# Altium PCB cardio_pcb_gnd40.PcbDoc
Units mil, origin at the board's own origin, x right, y up, seen from the top; angles counter-clockwise.
Board outline 6890 x 3346 mil, 2 copper layers (Top Layer, Bottom Layer); 111 components, 104 nets, 414 pads, 60 vias.
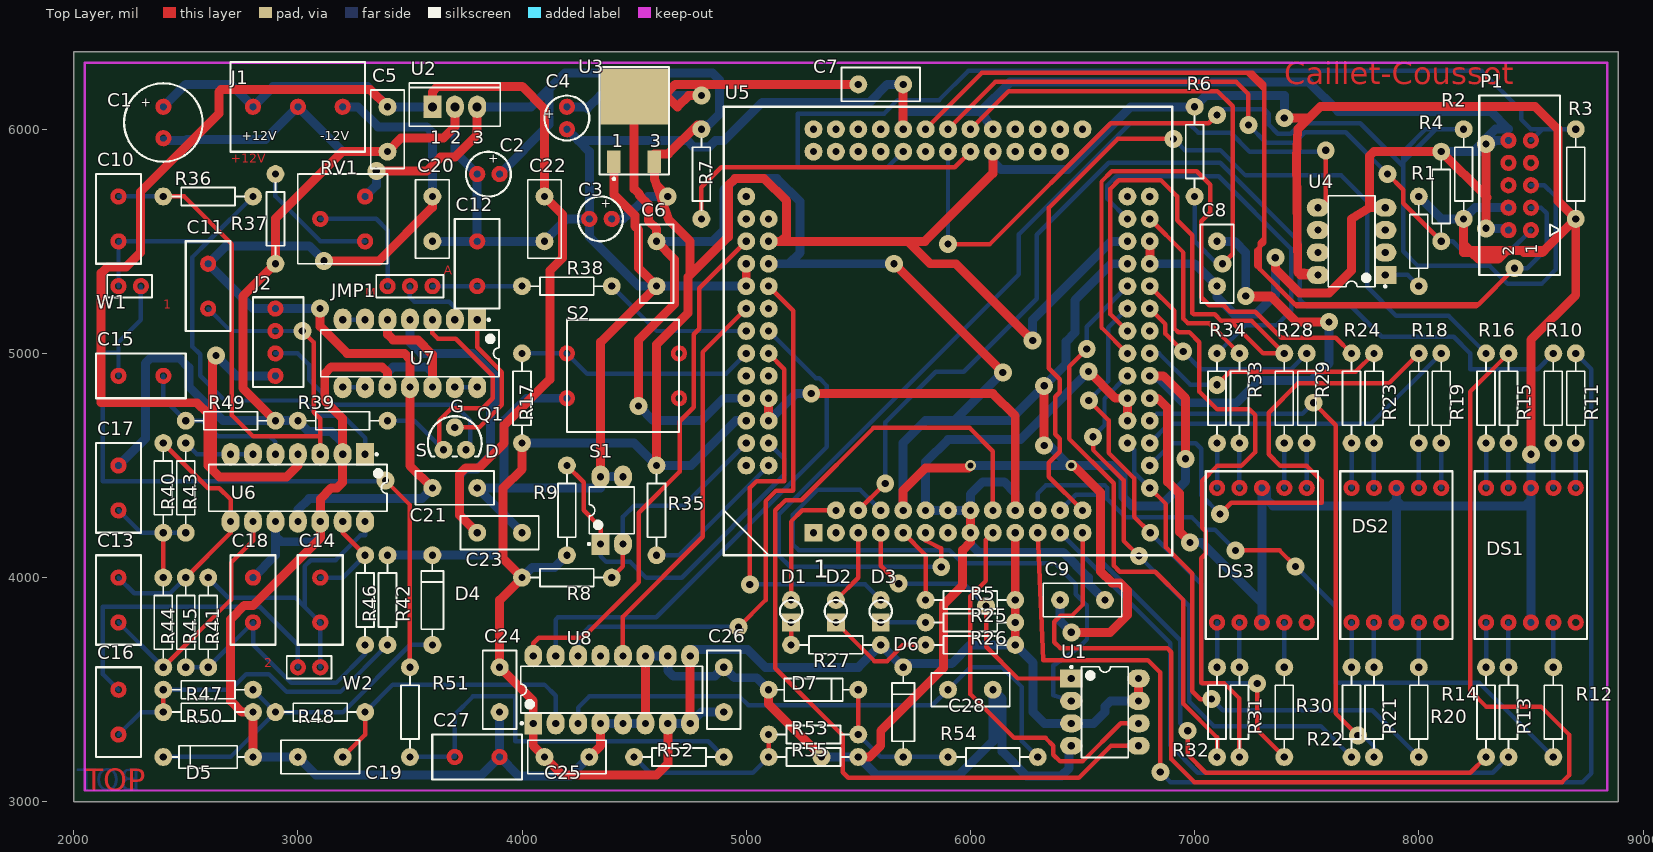
[diagram p0: Top Layer view]
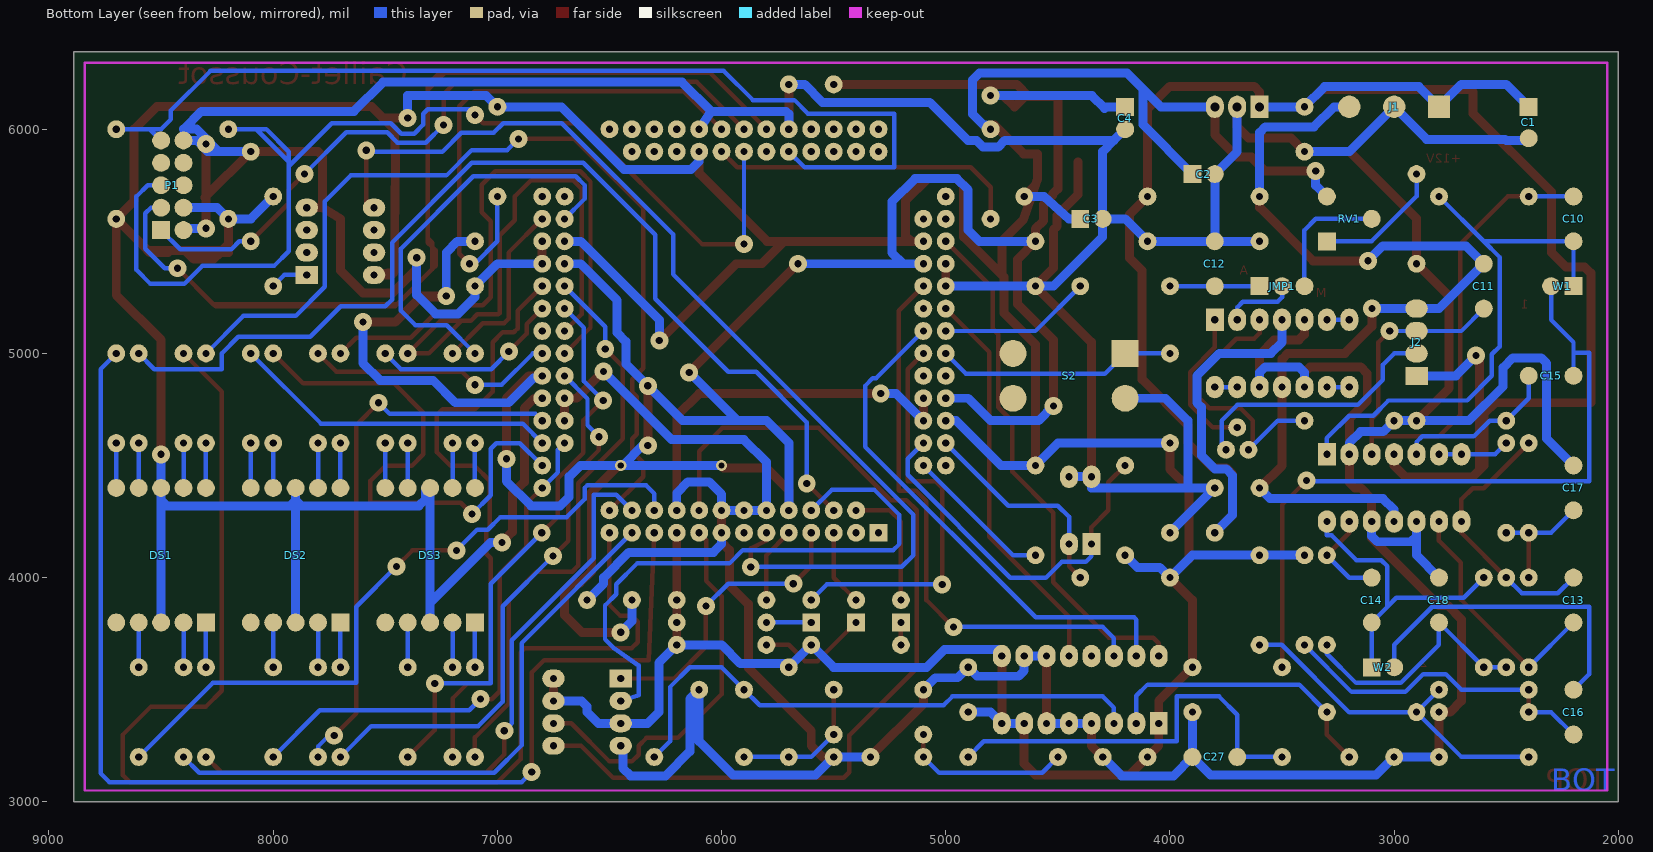
[diagram p1: Bottom Layer view, seen from below]

## Layer stack, top to bottom
Top Solder: solder mask 0.4, Solder Resist, Dk 3.5
Top Layer: signal copper 1.4
Dielectric 1: dielectric 12.6, FR-4, Dk 4.8
Bottom Layer: signal copper 1.4
Bottom Solder: solder mask 0.4, Solder Resist, Dk 3.5

## Board outline
2000,3000 8890,3000 8890,6346 2000,6346

## Design rules (kind name [scope] priority, off if disabled: settings)
Clearance [All] p1: gap=20
PolygonConnect [All] p1: connectstyle=Relief reliefconductorwidth=10 reliefentries=4 polygonreliefangle="90 Angle" airgapwidth=10
RoutingVias [All] p1: holewidth=32 width=80 viastyle="Through Hole" minholewidth=28 minwidth=50 maxholewidth=28 maxwidth=50
SolderMaskExpansion [All] p1: expansion=4
Width GND [InNet('GND')] p1: maxlimit=40 minlimit=20 preferedwidth=40
Width 3V3 [InNet('3V3')] p2: maxlimit=40 minlimit=20 preferedwidth=40
Width 1V5 [InNet('1V5')] p3: maxlimit=40 minlimit=20 preferedwidth=40
Width +12V [InNet('+12V')] p4: maxlimit=40 minlimit=20 preferedwidth=40
Width -12V [InNet('-12V')] p5: maxlimit=40 minlimit=20 preferedwidth=40
Width [All] p6: maxlimit=20 minlimit=20 preferedwidth=20
30 further rules are at their usual default settings.

## Classes and differential pairs
component class CONTROL: C1 C2 C3 C4 C5 C6 C7 C8 C9 D1 D2 D3 DS1 DS2 DS3 J1 P1 R1 R2 R3 R4 R5 R6 R7 R8 R9 R10 R11 R12 R13 R14 R15 R16 R17 R18 R19 R20 R21 R22 R23 R24 R25 R26 R27 R28 R29 R30 R31 R32 R33 R34 R35 S1 S2 U1 U2 U3 U4 U5
component class INTER: C10 C11 C12 C13 C14 C15 C16 C17 C18 C19 C20 C21 C22 C23 C24 C25 C26 C27 C28 D4 D5 D6 D7 J2 JMP1 Q1 R36 R37 R38 R39 R40 R41 R42 R43 R44 R45 R46 R47 R48 R49 R50 R51 R52 R53 R54 R55 RV1 U6 U7 U8 W1 W2
net class AFFC[0..6]: AFFC0 AFFC1 AFFC2 AFFC3 AFFC4 AFFC5 AFFC6
net class AFFD[0..6]: AFFD0 AFFD1 AFFD2 AFFD3 AFFD4 AFFD5 AFFD6
net class AFFU[0..6]: AFFU0 AFFU1 AFFU2 AFFU3 AFFU4 AFFU5 AFFU6

## Components (designator, comment, footprint, x,y, rotation, side; value= is the part's Value field where it differs from the comment)
C1 "100uF" RB0.14/0.35 2400,6100 r270 top
C2 "2.2uF" RB0.1/0.2 3900,5800 r180 top
C3 "10uF" RB0.1/0.2 4400,5600 r180 top
C4 "10uF" RB0.1/0.2 4200,6100 r270 top
C5 "0.1uF" RAD-0.2 3400,6000 r90 top
C6 "100nF" RAD-0.2 4600,5400 r90 top
C7 "100nF" RAD-0.2 5600,6200 r180 top
C8 "100nF" RAD-0.2 7100,5400 r90 top
C9 "100nF" RAD-0.2 6500,3900 r180 top
C10 "4.7nF" RAD-0.2-BOT 2200,5500 r90 top
C11 "470pF" RAD-0.2-BOT 2600,5200 r90 top
C12 "470nF" RAD-0.2-BOT 3800,5500 r270 top
C13 "15nF" RAD-0.2-BOT 2200,4000 r270 top
C14 "4.7nF" RAD-0.2-BOT 3100,3800 r90 top
C15 "470nF" RAD-0.2-BOT 2400,4900 r180 top
C16 "470nF" RAD-0.2-BOT 2200,3500 r270 top
C17 "220nF" RAD-0.2-BOT 2200,4300 r90 top
C18 "470nF" RAD-0.2-BOT 2800,3800 r90 top
C19 "100nF" RAD-0.2 3100,3200 r0 top
C20 "100nF" RAD-0.2 3600,5600 r90 top
C21 "100nF" RAD-0.2 3700,4400 r180 top
C22 "100nF" RAD-0.2 4100,5600 r90 top
C23 "100nF" RAD-0.2 3900,4200 r180 top
C24 "100nF" RAD-0.2 3900,3500 r90 top
C25 "100nF" RAD-0.2 4200,3200 r180 top
C26 "100nF" RAD-0.2 4900,3500 r270 top
C27 "470nF" RAD-0.2-BOT 3700,3200 r0 top
C28 "100nF" RAD-0.2 6000,3500 r180 top
D1 "LED0" LED-3MM 5200,3800 r90 top
D2 "LED0" LED-3MM 5400,3800 r90 top
D3 "LED0" LED-3MM 5600,3800 r90 top
D4 "1N4148" DIODE-0.4 3600,3900 r90 top
D5 "1N4148" DIODE-0.4 2600,3200 r180 top
D6 "1N4148" DIODE-0.4 5700,3400 r90 top
D7 "1N4148" DIODE-0.4 5300,3500 r0 top
DS1 "Dpy Blue-CA" AFF7SEG-14MM 8300,3800 r0 top
DS2 "Dpy Blue-CA" AFF7SEG-14MM 7700,3800 r0 top
DS3 "Dpy Blue-CA" AFF7SEG-14MM 7100,3800 r0 top
J1 "BORNIER 3 VIS" BORNIER-3 2800,6100 r0 top
J2 "CAPTEUR-CARDIO" KK-1X4M 2900,4900 r90 top
JMP1 "JUMPER-INV" JMP3-INV-0.1 3600,5300 r180 top
P1 "MHDR2X5" HE10-2X5M 8500,5550 r90 top
Q1 "2N7000" NMOS-TO92 3700,4600 r0 top
R1 "1K" AXIAL-0.4 8000,5500 r270 top
R2 "1K" AXIAL-0.4 8200,5800 r90 top
R3 "1K" AXIAL-0.4 8700,5800 r90 top
R4 "1K" AXIAL-0.4 8100,5700 r90 top
R5 "10K" AXIAL-0.4 6000,3900 r180 top
R6 "10K" AXIAL-0.4 7000,5900 r270 top
R7 "10K" AXIAL-0.4 4800,5800 r270 top
R8 "1K" AXIAL-0.4 4200,4000 r180 top
R9 "1K" AXIAL-0.4 4200,4300 r270 top
R10 "120" AXIAL-0.4 8600,4800 r270 top
R11 "120" AXIAL-0.4 8700,4800 r270 top
R12 "120" AXIAL-0.4 8600,3400 r90 top
R13 "120" AXIAL-0.4 8400,3400 r90 top
R14 "120" AXIAL-0.4 8300,3400 r90 top
R15 "120" AXIAL-0.4 8400,4800 r270 top
R16 "120" AXIAL-0.4 8300,4800 r270 top
R17 "1K" AXIAL-0.4 4000,4800 r270 top
R18 "120" AXIAL-0.4 8000,4800 r270 top
R19 "120" AXIAL-0.4 8100,4800 r270 top
R20 "120" AXIAL-0.4 8000,3400 r90 top
R21 "120" AXIAL-0.4 7800,3400 r90 top
R22 "120" AXIAL-0.4 7700,3400 r90 top
R23 "120" AXIAL-0.4 7800,4800 r270 top
R24 "120" AXIAL-0.4 7700,4800 r270 top
R25 "820" AXIAL-0.4 6000,3800 r0 top
R26 "820" AXIAL-0.4 6000,3700 r0 top
R27 "820" AXIAL-0.4 5400,3700 r0 top
R28 "120" AXIAL-0.4 7400,4800 r270 top
R29 "120" AXIAL-0.4 7500,4800 r270 top
R30 "120" AXIAL-0.4 7400,3400 r90 top
R31 "120" AXIAL-0.4 7200,3400 r90 top
R32 "120" AXIAL-0.4 7100,3400 r90 top
R33 "120" AXIAL-0.4 7200,4800 r270 top
R34 "120" AXIAL-0.4 7100,4800 r270 top
R35 "10K" AXIAL-0.4 4600,4300 r90 top
R36 "1M" AXIAL-0.4 2600,5700 r0 top
R37 "100" AXIAL-0.4 2900,5600 r90 top
R38 "3.3K" AXIAL-0.4 4200,5300 r180 top
R39 "82" AXIAL-0.4 3200,4700 r180 top
R40 "390K" AXIAL-0.4 2400,4400 r90 top
R41 "390K" AXIAL-0.4 2600,3800 r90 top
R42 "4.7M" AXIAL-0.4 3400,3900 r90 top
R43 "56K" AXIAL-0.4 2500,4400 r90 top
R44 "200K" AXIAL-0.4 2400,3800 r270 top
R45 "56K" AXIAL-0.4 2500,3800 r90 top
R46 "300K" AXIAL-0.4 3300,3900 r90 top
R47 "2.2M" AXIAL-0.4 2600,3500 r180 top
R48 "1K" AXIAL-0.4 3100,3400 r180 top
R49 "4.7M" AXIAL-0.4 2700,4700 r180 top
R50 "4.7M" AXIAL-0.4 2600,3400 r180 top
R51 "6.8M" AXIAL-0.4 3500,3400 r90 top
R52 "200" AXIAL-0.4 4700,3200 r180 top
R53 "2.2K" AXIAL-0.4 5300,3300 r180 top
R54 "1K" AXIAL-0.4 6100,3200 r180 top
R55 "100" AXIAL-0.4 5300,3200 r0 top
RV1 "1K" VR-3386F-T 3200,5600 r90 top
S1 "SW2 DIP4" DIP-4 4400,4300 r90 top
S2 "SW-PB" BP-MJTP12 4200,5000 r270 top
U1 "EPCS1SI8N" DIP-8 6600,3400 r0 top
U2 "LF33CV" REG-TO220 3600,6100 r90 top
U3 "NCP1117DT" REG-DPAK 4500,6000 r0 top
U4 "SG-8002DCPCB 20 MHZ" DIP-8 7700,5500 r180 top
U5 "EP1C3T100" SUPPORT-TQFP100 5300,4200 r90 top
U6 "TL074CN" DIP-14 3000,4400 r270 top
U7 "TL074CN" DIP-14 3500,5000 r270 top
U8 "ADS7841PB" DIP-16 4400,3500 r90 top
W1 "Jumper" JMP2-0.1 2200,5300 r0 top
W2 "Jumper" JMP2-0.1 3100,3600 r180 top

## Footprints (in the part's own frame and the unit in brackets; to place one, negate y for a bottom-side part, rotate by r counter-clockwise, add the part's x,y. Pads: shape width x height; smd on the part's side, far side on the other; paste and mask are expansions set on the pad)
AFF7SEG-14MM [mil] "Aff 7 seg (14mm) footprint"
  rect 80x80 smd far side: 1(0,0)
  round 80 smd far side: 2(100,0) 3(200,0) 4(300,0) 5(400,0) 6(400,600) 7(300,600) 8(200,600) 9(100,600) 10(0,600)
  Top Layer circle w20: c0,600 r26
  Top Layer circle w20: c100,600 r26
  Top Layer circle w20: c200,600 r26
  Top Layer circle w20: c300,600 r26
  Top Layer circle w20: c400,600 r26
  Top Layer circle w20: c400,0 r26
  Top Layer circle w20: c300,0 r26
  Top Layer circle w20: c200,0 r26
  Top Layer circle w20: c100,0 r26
  Top Layer circle w20: c0,0 r26
  silkscreen extent -50,-74 450,674
AXIAL-0.4 [mil] "Axial Device, Thru-Hole; 2 Leads; 0.4 in Pin Spacing"
  round 80 hole 32: 1(-200,0) 2(200,0)
  silkscreen extent -160,-40 160,40
BORNIER-3 [mil] "BORNIER-3 footprint"
  rect 100x100 smd far side: 1(0,0)
  round 100 smd far side: 2(200,0) 3(400,0)
  Top Layer circle w20: c0,0 r26
  Top Layer circle w20: c200,0 r26
  Top Layer circle w20: c400,0 r26
  silkscreen extent -100,-200 500,200
BP-MJTP12 [mil] "BP footprint"
  rect 120x120 smd far side: 1(0,0)
  round 120 smd far side: 2(200,0) 3(200,500) 4(0,500)
  Top Layer circle w20: c0,500 r26
  Top Layer circle w20: c200,500 r26
  Top Layer circle w20: c200,0 r26
  Top Layer circle w20: c0,0 r26
  silkscreen extent -150,0 350,500
DIODE-0.4 [mil] "Diode, Thru-Hole; 2 Leads; 0.4 in Pin Spacing"
  round 80 hole 32: 1(-200,0) 2(200,0)
  silkscreen extent -160,-50 160,50
DIP-4 [mil] "DIP; 4 Leads; Row Spacing 7.62 mm; Pitch 2.54 mm"
  rect 100x80 hole 32: 1(-150,50)
  oval 100x80 hole 32: 2(-150,-50) 3(150,-50) 4(150,50)
  silkscreen extent -155,-100 104,106, body extent -124,-98 124,98, height 220
DIP-8 [mil] "DIP; 8 Leads; Row Spacing 7.62 mm; Pitch 2.54 mm"
  rect 100x80 hole 32: 1(-150,150)
  oval 100x80 hole 32: 2(-150,50) 3(-150,-50) 4(-150,-150) 5(150,-150) 6(150,-50) 7(150,50) 8(150,150)
  silkscreen extent -155,-203 104,206, body extent -142,-203 142,203, height 200
DIP-14 [mil] "DIP; 14 Leads; Row Spacing 7.62 mm; Pitch 2.54 mm"
  rect 100x80 hole 32: 1(-150,300)
  oval 100x80 hole 32: 2(-150,200) 3(-150,100) 4(-150,0) 5(-150,-100) 6(-150,-200) 7(-150,-300) 8(150,-300) 9(150,-200) 10(150,-100) 11(150,0) 12(150,100) 13(150,200) 14(150,300)
  silkscreen extent -155,-398 104,398, body extent -142,-398 142,398, height 200
DIP-16 [mil] "DIP; 16 Leads; Row Spacing 7.62 mm; Pitch 2.54 mm"
  rect 100x80 hole 32: 1(-150,350)
  oval 100x80 hole 32: 2(-150,250) 3(-150,150) 4(-150,50) 5(-150,-50) 6(-150,-150) 7(-150,-250) 8(-150,-350) 9(150,-350) 10(150,-250) 11(150,-150) 12(150,-50) 13(150,50) 14(150,150) 15(150,250) 16(150,350)
  silkscreen extent -155,-406 104,406, body extent -142,-405 142,405, height 200
HE10-2X5M [mil] "CONNECTOR HE10 2X5 MALE"
  rect 80x80 smd far side: 1(0,0)
  round 80 smd far side: 2(0,100) 3(100,0) 4(100,100) 5(200,0) 6(200,100) 7(300,0) 8(300,100) 9(400,0) 10(400,100)
  Top Layer circle w20: c0,100 r26
  Top Layer circle w20: c100,100 r26
  Top Layer circle w20: c200,100 r26
  Top Layer circle w20: c300,100 r26
  Top Layer circle w20: c400,100 r26
  Top Layer circle w20: c400,0 r26
  Top Layer circle w20: c300,0 r26
  Top Layer circle w20: c200,0 r26
  Top Layer circle w20: c100,0 r26
  Top Layer circle w20: c0,0 r26
  silkscreen extent -200,-130 600,230
JMP2-0.1 [mil] "CAVALIER 3cts HE14 PAS 2.54MM"
  rect 80x80 smd far side: 1(0,0)
  round 80 smd far side: 2(100,0)
  Top Layer circle w20: c0,0 r26
  Top Layer circle w20: c100,0 r26
  silkscreen extent -50,-50 150,50
JMP3-INV-0.1 [mil] "CAVALIER 3cts HE14 PAS 2.54MM"
  rect 80x80 smd far side: 1(0,0)
  round 80 smd far side: 2(100,0) 3(200,0)
  Top Layer circle w20: c0,0 r26
  Top Layer circle w20: c100,0 r26
  Top Layer circle w20: c200,0 r26
  silkscreen extent -50,-50 250,50
KK-1X4M [mil]
  rect 80x100 smd far side: 1(0,0)
  oval 80x100 smd far side: 2(100,0) 3(200,0) 4(300,0)
  Top Layer circle w20: c0,0 r26
  Top Layer circle w20: c100,0 r26
  Top Layer circle w20: c200,0 r26
  Top Layer circle w20: c300,0 r26
  silkscreen extent -50,-125 350,100
LED-3MM [mil] "Led footprint"
  rect 80x80 hole 32: 1(0,0)
  round 80 hole 32: 2(100,0)
  silkscreen extent 0,-50 100,50
NMOS-TO92 [mil] "NMOS TO92"
  round 80 hole 32: 1(50,-30) 2(0,70) 3(-50,-30)
  silkscreen extent -120,-60 120,120
RAD-0.2 [mil] "Radial Cap, Thru-Hole; 2 Leads; 0.2 in Pin Spacing"
  round 80 hole 32: 1(-100,0) 2(100,0)
  silkscreen extent -175,-75 175,75
RAD-0.2-BOT [mil]
  round 80 smd far side: 1(0,0) 2(200,0)
  Top Layer circle w20: c0,0 r26
  Top Layer circle w20: c200,0 r26
  silkscreen extent -100,-100 300,100
RB0.1/0.2 [mil] "Capa < 100uF Footprint"
  rect 80x80 smd far side: 1(0,0)
  round 80 smd far side: 2(100,0)
  Top Layer circle w20: c100,0 r26
  Top Layer circle w20: c0,0 r26
  silkscreen extent -50,-100 150,100
RB0.14/0.35 [mil] "Capa <470 uF footprint"
  rect 80x80 smd far side: 1(0,0)
  round 80 smd far side: 2(140,0)
  Top Layer circle w20: c0,0 r26
  Top Layer circle w20: c140,0 r26
  silkscreen extent -105,-175 245,175
REG-DPAK [mm]
  rect 1.524x2.54 smd: 1(-2.285,-3.7) 3(2.285,-3.7)
  rect 7.62x6.35 smd: 4(0,3.7)
  silkscreen extent -3.94,-5.75 3.94,7.06
REG-TO220 [mil]
  rect 100x80 hole 40: 1(0,0)
  oval 100x80 hole 40: 2(0,-100) 3(0,-200)
  silkscreen extent -87,-303 106,103
SUPPORT-TQFP100 [mil]
  rect 80x80 hole 32: 1(0,0)
  round 80 hole 32: 2(0,-100) 3(100,-100) 4(0,-200) 5(100,-200) 6(0,-300) 7(100,-300) 8(0,-400) 9(100,-400) 10(0,-500) 11(100,-500) 12(0,-600) 13(100,-600) 14(0,-700) 15(100,-700) 16(0,-800) 17(100,-800) 18(0,-900) 19(100,-900) 20(0,-1000) 21(100,-1000) 22(0,-1100) 23(100,-1100) 24(0,-1200) 25(100,-1200) 26(300,-1500) 27(400,-1500) 28(400,-1400) 29(500,-1500) 30(500,-1400) 31(600,-1500) 32(600,-1400) 33(700,-1500) 34(700,-1400) 35(800,-1500) 36(800,-1400) 37(900,-1500) 38(900,-1400) 39(1000,-1500) 40(1000,-1400) 41(1100,-1500) 42(1100,-1400) 43(1200,-1500) 44(1200,-1400) 45(1300,-1500) 46(1300,-1400) 47(1400,-1500) 48(1400,-1400) 49(1500,-1500) 50(1500,-1400) 51(1800,-1200) 52(1800,-1100) 53(1700,-1100) 54(1800,-1000) 55(1700,-1000) 56(1800,-900) 57(1700,-900) 58(1800,-800) 59(1700,-800) 60(1800,-700) 61(1700,-700) 62(1800,-600) 63(1700,-600) 64(1800,-500) 65(1700,-500) 66(1800,-400) 67(1700,-400) 68(1800,-300) 69(1700,-300) 70(1800,-200) 71(1700,-200) 72(1800,-100) 73(1700,-100) 74(1800,0) 75(1700,0) 76(1500,300) 77(1400,300) 78(1400,200) 79(1300,300) 80(1300,200) 81(1200,300) 82(1200,200) 83(1100,300) 84(1100,200) 85(1000,300) 86(1000,200) 87(900,300) 88(900,200) 89(800,300) 90(800,200) 91(700,300) 92(700,200) 93(600,300) 94(600,200) 95(500,300) 96(500,200) 97(400,300) 98(400,200) 99(300,300) 100(300,200)
  silkscreen extent -100,-1600 1900,400
VR-3386F-T [mil] "TRIMMER serie 3386F-T"
  rect 80x80 smd far side: 1(-100,-100)
  round 80 smd far side: 2(100,-100) 3(0,100)
  Top Layer circle w20: c100,-100 r26
  Top Layer circle w20: c-100,-100 r26
  Top Layer circle w20: c0,100 r26
  silkscreen extent -200,-200 200,200

## Part data
C1 C2 C3 C4: library part "Cap Pol2", "Electrolytic Polarized Capacitor (Axial)"
C5 C6 C7 C8 C9: library part Cap, "Ceramic Multilayer Capacitor"
C10 C11 C12 C13 C14 C15 C16 C17 C18 C27: library part Cap, "Capacitor Polyester 5%"
C19 C20 C21 C22 C23 C24 C25 C26 C28: library part Cap, "Capacitor Céramique Multicouche X7R 50V RadialPas=5.08mm 50%"
D1 D2 D3: "Typical INFRARED GaAs LED"
D4 D5 D6 D7: "High Conductance Fast Diode"
DS1 DS2 DS3: "14.2 mm General Purpose Blue 7-Segment Display: CA, RH DP, Gray Surface"
J1: library part BORNIER-3, "Bornier 3 cts"
J2: "CAPTEUR CARDIO"
JMP1: "JUMPER INVERSEUR HE14 MALE 3 cts"
P1: "Header, 5-Pin, Dual row"
Q1: "N-channel Enhancement Mode Field-effect Transistor"
R1 R2 R3 R4 R5 R6 R7 R8 R9 R10 R11 R12 R13 R14 R15 R16 R17 R18 R19 R20 R21 R22 R23 R24 R25 R26 R27 R28 R29 R30 R31 R32 R33 R34 R35: library part Res2, "Resistor"
R36 R40 R41 R42 R43 R44 R45 R46 R47 R49 R50 R51: library part Res2, "Resistor 1% Couche métallique 0.4W Axial L=7mm"
R37 R38 R39 R48 R52 R53 R54 R55: library part Res2, "Resistor 5% Couche métallique 0.4W Axial L=7mm"
RV1: library part R-TRIM, "TRIMMER PRECISION POTENTIOMETER"
S1: library part SW2-DIP4, "Dual Switch in DIP 4 pin"
S2: "Switch"
U1: "EPCS1 Series, In-system programmable 3.3V serial configuration device, 8-Pin SOIC, 1-Megabit, Industrial Grade, Pb-Free"
U2: "500mA, Very Low Drop (0.45V) Voltage Regulator"
U3: "Low drop out Positive Fix. or Adj. Voltage Regulator"
U4: "OSCILLATOR SG-8002DCPCB 20 MHZ 5V"
U5: "FPGA CYCLONE 1 TQPF100"
U6 U7: "Low-Noise JFET-Input Operational Amplifier"
U8: "Analog to Digital converter"
W1 W2: "Jumper Wire"

## Via types
v1: diameter 80, hole 32, Top Layer to Bottom Layer, 58 vias
v2: diameter 50, hole 28, Top Layer to Bottom Layer, 2 vias

## Nets (pads, with @x,y where several pads share a name; then routed paths per layer and width w, separated by ;. In a path a pad name is that pad's centre, name@x,y a point inside that pad or via, vN(x,y) a via of type N, cw(c..) or ccw(c..) an arc to the next point about the centre after c; other vN are vias at no path point)
1V5: C4.1 C6.2 C7.2 C8.2 C9.2 U3.4 U5.9 U5.33 U5.44 U5.82 U5.93 | length 15064.4
  Top Layer w40: v1(4520,4766) 4520,5060 4680,5220 4680,5420 C6.2 4600,5555.69 4563.5,5592.19 4563.5,5663.82 4550.3,5677.02 4550.3,5677.62 4524.47,5703.45 4524.47,5709.53 4500,5734 U3.4 U3.4@4630,6145.67 ; v1(4800,6150) 4743,6150 4693,6100 4647.33,6145.67 U3.4@4630,6145.67 ; v1(5659.79,5400) v1(6144.4,4915.4) ; U5.9 5700,4389 5800,4489 5992,4489 v2@6003,4500 ; v1(6329,4590) v1(6329,4855.61) ; v1(6450,3756) 6623,3756 6700,3833 6700,3943 6667,3976 6632,3976 6580,4028 6580,4380 v2@6455,4505 ; U5.33 6860,4900 6960,4800 v1(6960,4530) ; v1(7600,5140) 7455.58,5140 7344.93,5250.64 ; U3.4@4630,6145.67 4684.33,6200 ; 4684.33,6200 4800,6200 C7.2 4684.33,6200 ; 7344.93,5250.64 7233.36,5250.64 v1(7228,5256) 7339.58,5256 7344.93,5250.64
  Bottom Layer w40: C4.1 4284,6100 4291,6093 4348,6150 v1(4800,6150) ; v1(4520,4766) 4586,4700 4800,4700 4900,4800 U5.93 ; C6.2 4850,5500 4900,5550 4900,5730 4950,5780 5137,5780 5240,5677 5240,5450 5190,5400 ; U5.82 5190,5400 ; v1(5659.79,5400) 5190,5400 ; U5.9 5700,4601 5800,4701 5930,4701 ; v2@6003,4500 v2@6441,4500 ; v1(6144.4,4915.4) 5930,4701 ; v1(6329,4590) 6351,4590 v2@6441,4500 ; C9.2 6400,3806 v1(6450,3756) ; v2@6455,4505 v2(6450,4500) ; U5.44 6629,5400 6465.93,5236.93 6465.93,5092.5 6426.39,5052.96 6426.39,4953 v1(6329,4855.61) 6174.39,4701 5930,4701 ; U5.33 6800,4890 6840,4890 6950,4780 7187.17,4780 7287.17,4880 7523,4880 7600,4957 v1(7600,5140) ; v1(6960,4530) 6960,4430 6850,4320 6720,4320 6680,4360 6680,4450 6630,4500 v2(6450,4500) ; C8.2 7178,5500 7228,5450 v1(7228,5256) ; v2@6441,4500 v2(6450,4500)
  other v2: 6000,4500
3V3: C2.1 C3.1 C24.2 C25.2 C26.2 D4.2 D6.2 DS1.3 DS1.8 DS2.3 DS2.8 DS3.3 DS3.8 P1.4 R1.1 R2.1 R3.1 R5.1 R6.1 R7.1 R8.2 R9.2 R17.2 R25.2 R26.2 R27.2 R35.2 R42.2 RV1.2 U1.3 U1.7 U1.8 U2.3 U3.3 U4.8 U5.18 U5.31 U5.46 U5.59 U5.80 U5.95 U8.1 U8.7 U8.8 U8.9 | length 27945
  Top Layer w40: v1(3350,5813) 3574,5813 3637,5876 3700,5876 3800,5976 U2.3 ; R17.2 4000,4484 3916,4400 3916,4084 R8.2 3900,3900 C24.2 4050,3450 U8.1 4050,3250 C25.2 4180,3120 4600,3120 4650,3170 U8.7 ; R35.2 4600,5040 4740,5180 4740,5340 4750,5350 ; v1(4650,5700) 4650,5700.58 4600.43,5750.15 ; U8.8 U8.9 ; R7.1 4800,6020 4783.21,6020 4653.17,5889.96 4589.96,5889.96 U3.3 4589.96,5780 ; U5.80 5155,5500 ; U5.59 6100,5803 5797,5500 5720,5500 ; R26.2 R25.2 R5.1 U5.18 ; v1(6277.61,5057.39) 5935,5400 5820,5400 5720,5500 ; U1.7 U1.8 ; U5.31 6835,4800 6880,4755 6880,4426.98 6932.82,4374.16 6932.82,4204.18 v1(6980,4157) ; v1(7400,6050) 7505,6050 7507.5,6047.5 ; R2.1 8200,5486.86 ; v1(8500,4550) 8500,5060 8700,5260 R3.1 ; 4589.96,5780 4600.43,5750.15 ; 4589.96,5780 4600.43,5750.15 ; 4600.43,5750.15 4654.79,5595.21 ; 4600.43,5750.15 4654.79,5595.21 ; 4654.79,5595.21 4750,5500 4750,5350 ; 4750,5350 4920,5520 4920,5750 4950,5780 5080,5780 5180,5680 5180,5525 5155,5500 ; 5155,5500 5720,5500 ; 7460,5362.46 7455,5876 7460,6000 7507.5,6047.5 ; 7460,5362.46 7472.46,5350 U4.8 7460,5362.46 ; 7507.5,6047.5 7562,6102 8518,6102 8620,6000 8620,5680 R3.1 ; 8200,5486.86 8226.86,5460 8393.86,5460 ; 8200,5486.86 8200,5450 8236.86,5450 8266.86,5420 8353.86,5420 8393.86,5460 ; 8393.86,5460 8460.14,5460 ; 8460.14,5460 8470.14,5450 8550,5450 8560,5460 ; 8460.14,5460 8560,5460 ; 8560,5460 R3.1
  Bottom Layer w40: RV1.2 3350,5750 v1(3350,5813) ; R42.2 D4.2 3900,4100 R8.2 4045.5,4045.5 4145.5,4045.5 R9.2 ; U2.3 4041,6100 4120,6179 ; C2.1 4120,6020 4120,6179 ; R17.2 4500,4600 R35.2 4753.47,4500 4953.47,4700 U5.95 ; C3.1 4450,5600 4562.61,5700 v1(4650,5700) ; U8.7 U8.8 4800,3400 C26.2 ; U8.9 4750,3680 5005,3680 5085,3600 5500,3600 R27.2 D6.2@5684,3616 ; R7.1 4820,6020 4833.14,6020 4880,6066.86 4880,6220 4850,6250 4191,6250 4120,6179 ; D6.2 D6.2@5684,3616 ; U5.59 6100,5857 6137,5820 6434.67,5820 6714.67,6100 R6.1 7050,6150 7400,6150 v1(7400,6050) ; v1(6277.61,5057.39) 6277.61,5149.33 6628.28,5500 U5.46 ; U1.7 6625,3450 6600,3425 6600,3400 6550,3350 U1.3 6330,3350 6280,3400 6280,3620 R26.2 6000,3700 5916,3616 D6.2@5684,3616 ; v1(6980,4157) 7030,4157 7300,3887 ; DS3.3 7300,3887 ; DS2.3 7900,4345 ; DS2.8 7900,4345 ; R1.1 8100,5600 R2.1 8250,5650 P1.4 ; DS1.3 8500,4345 ; v1(8500,4550) DS1.8 8500,4345 ; 7300,3887 DS3.8 7320,4400 7320,4350 7350,4320 7875,4320 7900,4345 ; 7900,4345 7925,4320 8475,4320 8500,4345
+12V: C1.1 C5.2 C22.2 C23.2 J1.1 J2.1 U2.1 U6.4 U7.4 | length 10010.1
  Top Layer w40: v1(2635,4990) 2620,4975 2620,4479 ; U6.4 3000,4499 2950,4449 2650,4449 2620,4479 ; C5.2 3323,6177 2658,6177 2648,6167 2648,6070 2298,5720 2298,5450 2233,5385 2150,5385 2123,5358 2123,4781 2124,4780 2550,4780 2600,4730 2600,4499 2620,4479 ; U2.1 3600,6166 3625,6191 4000,6191 4100,6091 C22.2 4180,5620 4180,5425 4124,5369 4124,4884 3920,4680 3920,4600 3810,4490 3750,4490 3720,4460 3720,4280 C23.2
  Bottom Layer w40: C1.1 2500,6200 2700,6200 J1.1 2890,6190 3310,6190 C5.2 U2.1 ; v1(2635,4990) 2725,4900 J2.1 ; U7.4 3500,5050 3550,5000 3780,5000 3880,4900 3880,4780 3860,4760 3860,4545 3800,4485 3750,4485 3720,4455 3720,4280 C23.2
-12V: C11.2 C20.2 C21.2 J1.3 J2.4 U6.11 U7.11 | length 4372.9
  Top Layer w40: v1(3099,5200) 3099,5121 3220,5000 3475,5000 3500,4975 U7.11 3500,4500 C21.2 ; v1(3117.29,5413) 3362,5413 3600,5651 C20.2
  Bottom Layer w40: U6.11 3000,4302.77 3050,4352.77 3552.77,4352.77 C21.2 ; v1(3099,5200) J2.4 2800,5200 C11.2 2680,5480 3050.29,5480 v1(3117.29,5413) ; J1.3 3268,6100 3358,6010 3575,6010 3600,5985 C20.2
AFFC0: R28.1 U5.38 | length 2342
  Top Layer w20: U5.38 6624.67,5175.33 6624.67,5734.67 6662,5772 6850,5772 6922,5700 6922,5594.57 6990,5526.57 6990,5180 6995.82,5174.18 7089.82,5174.18 7118,5146 7159.64,5146 ; 7159.64,5146 7305.64,5000 R28.1 7254,5146 7159.64,5146
AFFC1: R29.1 U5.39 | length 865.6
  Top Layer w20: U5.39 6870,5130 6870,5087.71 v1(6949,5008.71)
  Bottom Layer w20: v1(6949,5008.71) 7027.71,4930 7430,4930 R29.1
AFFC2: R30.1 U5.40 | length 2578.3
  Top Layer w20: v1(6528,4790) 6617,4701 6617,4556.14 6730,4443.14 6730,4272 v1(6802,4200) ; v1(7279,3528) 7280,3527 7280,3320 R30.1
  Bottom Layer w20: v1(6528,4790) 6614,4876 6614,5114 U5.40 ; v1(6802,4200) 7030,3972 7030,3528 v1(7279,3528)
AFFC3: R31.1 U5.41 | length 2713.2
  Top Layer w20: U5.41 6910,5190 6910,5111 6926.82,5094.18 6976.82,5094.18 7021,5050 7021,4830 7100,4751 7244,4751 7270,4725 7270,4560 7208,4498 7100,4498 7034,4432 7034,4222.43 7050,4206.43 7050,4106.43 7030,4086.43 7030,3531 7033,3528 7133,3528 7200,3461 R31.1
AFFC4: R32.1 U5.42 | length 2573.5
  Top Layer w20: v1(6518.71,5019.79) 6440,4941.08 6440,4620 6638.59,4421.41 6638.59,4053.69 6666.29,4026 6824,4026 6950,3900 6950,3437 7100,3287 R32.1
  Bottom Layer w20: v1(6518.71,5019.79) 6518.71,5118.71 U5.42
AFFC5: R33.1 U5.47 | length 821.7
  Top Layer w20: U5.47 6950,5450 6950,5154.31 6970.13,5134.18 7065.82,5134.18 R33.1
AFFC6: R34.1 U5.48 | length 1842.1
  Bottom Layer w20: U5.48 6611,5689 6611,5751 6650,5790 7107,5790 7430,5467 7430,5190.65 7365.35,5126 7226,5126 R34.1
AFFD0: R18.1 U5.26 | length 2430.5
  Top Layer w20: v1(7113,4284) 7163,4334 7567,4334 7567,4431 7500,4498 7382,4498 7330,4550 7330,4736 7460,4866 7866,4866 R18.1
  Bottom Layer w20: U5.26 6900,4600 7005,4600 7030,4575 7030,4367 v1(7113,4284)
AFFD1: R19.1 U5.27 | length 1465.7
  Bottom Layer w20: U5.27 6887,4687 7787,4687 R19.1
AFFD2: R20.1 U5.28 | length 2358.5
  Top Layer w20: v1(6800,4400) 6872,4328 6872,4136.1 6990,4018.1 6990,3493 7025,3458 v1(7075,3458)
  Bottom Layer w20: U5.28 6730,4570 6730,4470 v1(6800,4400) ; v1(7075,3458) 7125,3408 7792,3408 R20.1
AFFD3: R21.1 U5.29 | length 2468.4
  Top Layer w20: v1(7530,4780) 7630,4680 7630,3394 v1(7728,3296)
  Bottom Layer w20: U5.29 6830,4730 7480,4730 v1(7530,4780) ; v1(7728,3296) 7751,3296 7800,3247 R21.1
AFFD4: R22.1 U5.34 | length 2520.2
  Top Layer w20: v1(6547,4628) 6547,4569.57 6683,4433.57 6683,4165 v1(6752,4096)
  Bottom Layer w20: v1(6547,4628) 6598,4679 6598,4798 U5.34 ; v1(6752,4096) 6976.4,3871.6 6976.4,3447 7085.4,3338 7562,3338 R22.1
AFFD5: R23.1 U5.35 | length 1116
  Top Layer w20: v1(7100,4860) 7159,4919 7719,4919 R23.1
  Bottom Layer w20: U5.35 6841.23,5000 6981.23,4860 v1(7100,4860)
AFFD6: R24.1 U5.36 | length 2635.6
  Top Layer w20: U5.36 6584.67,5115.33 6584.67,5766.72 6629.95,5812 7010,5812 7070,5752 7070,5630 7030,5590 7030,5250 7065.82,5214.18 7129.82,5214.18 7158,5186 7270.57,5186 7386.57,5070 7630,5070 R24.1
AFFU0: R10.1 U5.5 | length 4668.2
  Top Layer w20: U5.5 v1(5620,4420)
  Bottom Layer w20: v1(5620,4420) 5620,4692 5846,4918 5970,4918 6295.93,5243.93 6295.93,5529 6616.93,5850 7114,5850 7470,5494 7470,5240 7500,5210 7699.19,5210 7835.19,5074 8156,5074 8230,5000 8230,4930 8530,4930 R10.1
AFFU1: R11.1 U5.20 | length 5417.1
  Top Layer w20: U5.20 6325,3632 6792,3632 6847,3577 v1(6847,3133)
  Bottom Layer w20: v1(6847,3133) 6892,3088 8731,3088 8770,3127 8770,4930 R11.1
AFFU2: R12.1 U5.21 | length 3120.1
  Top Layer w20: v1(7183,4121.11) 7378.89,4121.11 v1(7450,4050)
  Bottom Layer w20: U5.21 6300,4375 6336.13,4411.13 6600,4411.13 6611.18,4399.95 6611.18,4350 6691.18,4270 6986.43,4270 7043,4213.43 7090.68,4213.43 v1(7183,4121.11) ; v1(7450,4050) 7630,3870 7630,3530 8270,3530 R12.1
AFFU3: R13.1 U5.22 | length 2739.7
  Bottom Layer w20: U5.22 6892.2,3707.8 6892.2,3251.19 7013.39,3130 8330,3130 R13.1
AFFU4: R14.1 U5.23 | length 2916.8
  Top Layer w20: v1(6969,3317) 6969,3211 7050,3130 8230,3130 R14.1
  Bottom Layer w20: U5.23 6470,4370 6570,4370 6570,4086.57 6936.4,3720.17 6936.4,3349.6 v1(6969,3317)
AFFU5: R15.1 U5.24 | length 5693.8
  Top Layer w20: U5.24 6500,3878 6451,3829 6400,3829 6374,3803 6374,3712 6400,3686 6877.68,3686 6896.4,3667.28 6896.4,3190.6 6999,3088 8639,3088 8670,3119 8670,3300 8545,3425 8300,3425 8230,3495 8230,4830 R15.1
AFFU6: R16.1 U5.25 | length 4165.5
  Top Layer w20: U5.25 6350,4450 6350,4512.01 6399,4561.01 6399,4618.99 6379,4638.99 6379,4806.62 6399,4826.62 6399,4884.61 6350,4933.61 6350,5649 6658,5957 v1(6906,5957)
  Bottom Layer w20: v1(6906,5957) 6956,5907 7114.06,5907 7227.06,5794 7654,5794 7770,5678 7770,5297 7900,5167 8133,5167 R16.1
BP-REG: R17.1 S2.1 U5.89 | length 1074.6
  Bottom Layer w20: R17.1 S2.1 4290,4910 4910,4910 U5.89
CH0: C19.2 R48.1 U8.2 | length 1286.1
  Top Layer w20: C19.2 3300,3300 R48.1
  Bottom Layer w20: R48.1 3423,3523 4100,3523 4150,3473 U8.2
CH1: C28.2 R54.1 U8.3 | length 2535.2
  Bottom Layer w20: U8.3 4250,3420 4300,3470 4970,3470 5010,3430 5830,3430 C28.2 6000,3600 6142.05,3600 6230,3512.05 6230,3270 R54.1
GND: C1.2 C2.2 C3.2 C4.2 C5.1 C6.1 C7.1 C8.1 C9.1 C12.1 C17.2 C18.2 C19.1 C20.1 C21.1 C22.1 C23.1 C24.1 C25.1 C26.1 C27.2 C28.1 D5.1 D7.1 J1.2 P1.2 P1.10 R4.2 R37.1 R39.2 R49.1 R50.1 R55.2 S1.3 S1.4 S2.2 U1.4 U2.2 U3.1 U4.4 U5.11 U5.13 U5.14 U5.15 U5.19 U5.30 U5.32 U5.43 U5.45 U5.58 U5.66 U5.81 U5.83 U5.94 U5.96 U6.2 U6.10 U6.12 U7.5 U7.10 U7.12 U8.4 U8.5 U8.6 U8.10 U8.11 | length 34493.7
  Top Layer w40: D5.1 R50.1 2750,3400 2700,3450 2700,3814 2762,3876 2800,3876 3100,4176 U6.12 3100,4350 3150,4400 3175,4400 3200,4425 U6.2 3200,4709 3120,4789 3120,4910 3150,4940 3375,4940 3400,4915 U7.10 ; R49.1 2755,4845 2755,5255 R37.1 2900,5601 3199,5900 C5.1 3461,5961 3650,5961 3700,6011 U2.2 ; U7.5 3400,5085 3425,5060 3535,5060 3600,4995 U7.12 ; C25.1 4350,3250 U8.4 ; S1.4 4350,5050 C6.1 4520,5380 4520,5550.83 4503.5,5567.33 4503.5,5615.5 4410.04,5708.96 U3.1 ; U8.6 U8.11 ; U5.83 U5.81 ; D7.1 5100,3436 v1(5336,3200) ; U5.96 U5.94 ; v1(5290,4821) 6100,4821 6200,4721 U5.19 ; R55.2 5550,3200 5600,3250 5600,3317 5880,3597 5880,3882.06 5964.94,3967 5964.94,4122.94 6000,4158 U5.14 U5.15 ; U5.66 C7.1 ; v1(6527,4920) 6647,4800 U5.32 U5.30 ; U5.43 U5.45 ; v1(7360,5427) 7360,5377 7467,5270 7600,5270 7700,5370 7700,5600 7780,5650 ; U4.4 7780,5650 ; v1@8300,5550 v1(8300,5558) 8300,5692 ; v1(8300,5934) 8300,5700 ; 7780,5650 7780,5880 7800,5900 R4.2 8300,5700 ; 8300,5692 8304,5696 8300,5700 ; 8300,5692 8300,5700
  Bottom Layer w40: C17.2 2320,4620 2320,4956 2344,4980 2470.17,4980 2514,4936.17 2514,4852.46 2666.46,4700 R49.1 R39.2 3049,4651 3150,4651 3200,4601 U6.2 ; C1.2@2400,5950 2500,5950 2505,5955 2855,5955 J1.2 3200,5900 C5.1 ; D5.1 C19.1 3080,3120 3820,3120 C27.2 ; C18.2 2900,4100 2900,4185 ; U6.10 2900,4185 ; U6.12 3100,4185 3075,4160 2925,4160 2900,4185 ; U7.10 3400,4915 3425,4940 3575,4940 3600,4915 U7.12 ; C20.1 C12.1 ; U2.2 3700,5900 C2.2 C12.1 ; C24.1 C27.2 ; C23.1 C21.1 3920,4400 ; S2.2 4020,4800 3920,4700 3920,4400 ; C4.2 4250,5950 ; C25.1 4216,3116 3984,3116 C27.2 ; U8.4 U8.5 U8.6 ; S1.3 S1.4 4350,4400 3920,4400 ; U8.11 U8.10 4650,3585 4675,3560 4860,3560 C26.1 4946.63,3553.37 5046.63,3553.37 D7.1 ; U5.83 C6.1 4520,5300 4300,5520 C3.2 ; U5.96 5221,4821 v1(5290,4821) ; v1(5336,3200) R55.2 5580,3120 5950,3120 6100,3270 C28.1 6141.2,3458.8 6141.2,3224.8 6250,3116 6406,3116 6440,3150 6440,3250 U1.4 ; U5.66 5700,6067 5713,6080 6047,6080 ; C7.1 5630,6200 5550,6120 5072,6120 4902,5950 4863.14,5950 4833.14,5920 4766.86,5920 4736.86,5950 4250,5950 ; U5.14 6000,4150 6037,4113 6413.46,4113 6526.46,4000 6526.46,3973.54 C9.1 ; U5.58 6047,6080 ; U5.19 6200,4377 6150,4427 6055.78,4427 6000,4371.22 U5.15 U5.13 U5.11 5800,4516 5900,4616 6223,4616 v1(6527,4920) ; U5.43 7000,5400 C8.1 7100,5251 7175,5176 7275,5176 7360,5261 v1(7360,5427) ; R4.2 8242,5900 ; v1(8300,5558) 8392,5558 P1.2 ; v1(8300,5934) 8316,5950 8342,5950 ; P1.10 8342,5950 ; C12.1 C22.1 4200,5600 C3.2 ; 4250,5950 4300,5900 C3.2 ; 6047,6080 6177,6210 7510,6210 7640,6080 8320,6080 8400,6000 8342,6000 8242,5900 ; 8242,5900 8292,5900 8342,5950
LED-AL: D3.2 U5.90 | length 1808.4
  Top Layer w20: v1(5016,3970) 5016,4400 5046,4430 5170,4430 5170,4930 U5.90
  Bottom Layer w20: v1(5016,3970) 5530,3970 D3.2
LED-BF: D1.2 U5.3 | length 570.7
  Top Layer w20: D1.2 5200,4250 5250,4300 U5.3
LED-POU: D2.2 U5.4 | length 341.4
  Top Layer w20: D2.2 5500,4000 U5.4
NetC10_1: C10.1 R36.2 U6.1 W1.1 | length 2449.3
  Bottom Layer w20: W1.1 C10.1 2600,5500 ; R36.2 2600,5500 ; U6.1 3300,4622.47 3200,4722.47 3093,4722.47 3025.47,4790 2674,4790 2564,4900 2564,4996 2530,5030 2530,5430 2600,5500
NetC10_2: C10.2 C11.1 J2.3 R36.1 U6.3 | length 2838
  Top Layer w20: R36.1 2493,5700 2705,5488 2705,4725 2800,4630 3092,4630 3100,4622 ; v1(3020,5100) 3070,5050 3070,4738 3100,4708 3100,4622 ; U6.3 3100,4622
  Bottom Layer w20: C10.2 R36.1 ; C11.1 2700,5100 J2.3 v1(3020,5100)
NetC12_2: C12.2 JMP1.1 R38.2 | length 400
  Bottom Layer w20: JMP1.1 C12.2 R38.2
NetC13_1: C13.1 R40.2 R45.2 U6.8 | length 1193.8
  Top Layer w20: R40.2 2601,4399 2650,4399 2700,4349 U6.8 2700,4200 R45.2
  Bottom Layer w20: C13.1 2270,3930 2430,3930 R45.2
NetC13_2: C13.2 R44.2 U6.9 | length 1098.5
  Top Layer w20: R44.2 2702,3902 2702,4066 2800,4164 U6.9
  Bottom Layer w20: C13.2 R44.2
NetC14_1: C14.1 R41.2 U6.14 W2.1 | length 1352
  Bottom Layer w20: R41.2 2690,3910 2990,3910 3030,3870 ; W2.1 C14.1 3030,3870 ; U6.14 3300,4188 3279,4188 3168,4077 3057,4077 3030,4050 3030,3870
NetC14_2: C14.2 R46.2 U6.13 | length 432.8
  Top Layer w20: U6.13 3200,4200 R46.2
  Bottom Layer w20: C14.2 3200,4000 R46.2
NetC15_1: C15.1 R49.2 U6.5 | length 735.8
  Bottom Layer w20: C15.1 2400,4800 R49.2 2574,4700 2644,4630 2875,4630 2900,4605 U6.5
NetC16_1: C16.1 W2.2 | length 1439.4
  Bottom Layer w20: C16.1 2130,3570 2130,3870 2830,3870 3000,3700 W2.2
NetC16_2: C16.2 R42.1 R47.2 R50.2 | length 1490.5
  Top Layer w20: R50.2 R47.2
  Bottom Layer w20: C16.2 2300,3400 R50.2 ; R47.2 2700,3500 2770,3570 2870,3570 2950,3490 3190,3490 R42.1
NetC17_1: C17.1 R40.1 R43.1 R44.1 | length 541.4
  Top Layer w20: R44.1 R40.1
  Bottom Layer w20: C17.1 2300,4200 R40.1 R43.1
NetC18_1: C18.1 R41.1 R45.1 R46.1 | length 1147.1
  Bottom Layer w20: R45.1 R41.1 C18.1 2800,3700 2970,3530 3170,3530 3300,3660 R46.1
NetC27_1: C27.1 R51.1 R52.1 | length 1851.5
  Bottom Layer w20: R51.1 C27.1 3700,3389 3781,3470 3970,3470 3970,3270 4830,3270 R52.1
NetD1_1: D1.1 R27.1 | length 100
  Top Layer w20: R27.1 D1.1
NetD2_1: D2.1 R26.1 | length 501.1
  Top Layer w20: D2.1 5572,3628 5629,3628 5701,3700 R26.1
NetD3_1: D3.1 R25.1 | length 200
  Bottom Layer w20: D3.1 R25.1
NetD4_1: D4.1 D5.2 R47.1 R48.2 | length 1548.5
  Bottom Layer w20: D5.2 2700,3200 R48.2 ; R47.1 R48.2 ; D4.1 3501,3700 3201,3400 R48.2
NetD6_1: D6.1 D7.2 R53.1 R54.2 | length 641.4
  Top Layer w20: R53.1 D7.2
  Bottom Layer w20: R53.1 5600,3200 D6.1 R54.2
NetDS1_1: DS1.1 R14.2 | length 200
  Bottom Layer w20: R14.2 DS1.1
NetDS1_2: DS1.2 R13.2 | length 200
  Bottom Layer w20: R13.2 DS1.2
NetDS1_4: DS1.4 R12.2 | length 200
  Bottom Layer w20: R12.2 DS1.4
NetDS1_6: DS1.6 R11.2 | length 200
  Bottom Layer w20: DS1.6 R11.2
NetDS1_7: DS1.7 R10.2 | length 200
  Bottom Layer w20: DS1.7 R10.2
NetDS1_9: DS1.9 R15.2 | length 200
  Bottom Layer w20: DS1.9 R15.2
NetDS1_10: DS1.10 R16.2 | length 200
  Bottom Layer w20: DS1.10 R16.2
NetDS2_1: DS2.1 R22.2 | length 200
  Bottom Layer w20: R22.2 DS2.1
NetDS2_2: DS2.2 R21.2 | length 200
  Bottom Layer w20: R21.2 DS2.2
NetDS2_4: DS2.4 R20.2 | length 200
  Bottom Layer w20: R20.2 DS2.4
NetDS2_6: DS2.6 R19.2 | length 200
  Bottom Layer w20: DS2.6 R19.2
NetDS2_7: DS2.7 R18.2 | length 200
  Bottom Layer w20: DS2.7 R18.2
NetDS2_9: DS2.9 R23.2 | length 200
  Bottom Layer w20: DS2.9 R23.2
NetDS2_10: DS2.10 R24.2 | length 200
  Bottom Layer w20: DS2.10 R24.2
NetDS3_1: DS3.1 R32.2 | length 200
  Bottom Layer w20: R32.2 DS3.1
NetDS3_2: DS3.2 R31.2 | length 200
  Bottom Layer w20: R31.2 DS3.2
NetDS3_4: DS3.4 R30.2 | length 200
  Bottom Layer w20: R30.2 DS3.4
NetDS3_6: DS3.6 R29.2 | length 200
  Bottom Layer w20: DS3.6 R29.2
NetDS3_7: DS3.7 R28.2 | length 200
  Bottom Layer w20: DS3.7 R28.2
NetDS3_9: DS3.9 R33.2 | length 200
  Bottom Layer w20: DS3.9 R33.2
NetDS3_10: DS3.10 R34.2 | length 200
  Bottom Layer w20: DS3.10 R34.2
NetJ2_2: J2.2 Q1.1 | length 1171.8
  Bottom Layer w20: J2.2 3000,5000 3050,4950 3050,4883 3163,4770 3700,4770 3770,4700 3770,4590 Q1.1
NetJMP1_2: JMP1.2 U7.2 | length 323.6
  Bottom Layer w20: JMP1.2 3500,5250 3520,5230 3675,5230 3700,5205 U7.2
NetJMP1_3: JMP1.3 RV1.3 | length 570.7
  Bottom Layer w20: RV1.3 3350,5600 3400,5550 JMP1.3
NetP1_1: P1.1 R4.1 U5.62 | length 3185.1
  Top Layer w20: U5.62 6111,6211 7185.04,6211 7240,6156.04 v1(7240,6019) ; v1(7860,5800) 7930,5730 7930,5670 R4.1
  Bottom Layer w20: v1(7240,6019) 7319,5940 7445.56,5940 7491.56,5986 7674,5986 v1(7860,5800) ; R4.1 8151,5500 8186,5465 8415,5465 P1.1
NetP1_3: P1.3 U5.64 | length 5247.4
  Top Layer w20: U5.64 6051,6251 7234,6251 ; v1(8427,5380) 8267,5220 ; 7234,6251 7310,6175 ; 7234,6251 7259,6251 7310,6200 7310,6175 ; 7290,5376.29 7290,5474.29 ; 7290,5376.29 7275,5391.29 7275,5459.29 7290,5474.29 ; 7290,5376.29 7446.29,5220 ; 7290,5474.29 7310,5494.29 7310,5514 ; 7290,5474.29 7290,5494 7310,5514 ; 7310,5514 7310,6175 ; 7446.29,5220 8267,5220 ; 7446.29,5220 7456.29,5210 8257,5210 8267,5220
  Bottom Layer w20: v1(8427,5380) 8483,5380 8570,5467 8570,5625 8545,5650 P1.3
NetP1_5: P1.5 R2.2 U5.63 | length 5047.4
  Top Layer w20: v1(5900,5488) 6087,5488 6626,6027 7063,6027 v1(7100,6064)
  Bottom Layer w20: v1(5900,5488) U5.63 ; v1(7100,6064) 7125,6089 7310,6089 7330,6069 7330,6021.01 7371.01,5980 7428.99,5980 7474.99,6026 7739,6026 7930,5835 ; R2.2 8075,6000 ; P1.5 8560,5750 8610,5700 8610,5372.51 8547.49,5310 8397,5310 8317,5390 7996,5390 7930,5456 7930,5835 ; 7930,5835 7930,5855 ; 7930,5855 8075,6000 ; 7930,5855 7930,5900 8030,6000 8075,6000
NetP1_9: P1.9 R3.2 U5.67 | length 4489.5
  Bottom Layer w20: U5.67 5630,5830 5230,5830 5230,6070 5615,6070 5675,6130 5860,6130 5990,6260 8280,6260 8456.46,6083.54 8456.46,6043.54 8500,6000 8550,6000 ; P1.9 8550,6000 ; R3.2 8550,6000
NetQ1_2: Q1.2 U7.1 | length 677
  Top Layer w20: Q1.2 3810,4670 3910,4770 3910,4917 3800,5027 U7.1
NetQ1_3: Q1.3 R39.1 U7.3 | length 1231.7
  Top Layer w20: U7.3 3600,5091 3625,5066 3704,5066 3870,4900 3870,4800 3825,4755 3685,4755 3630,4700 3630,4590 Q1.3
  Bottom Layer w20: R39.1 3520,4700 Q1.3
NetR1_2: R1.2 U4.1 | length 170.7
  Bottom Layer w20: U4.1 7950,5350 R1.2
NetR5_2: R5.2 U5.8 | length 341.4
  Top Layer w20: U5.8 5800,4100 R5.2
NetR6_2: R6.2 U5.60 | length 2355.6
  Top Layer w20: U5.60 6170,6170 7101.86,6170 7170,6101.86 7170,5445 v1(7125,5400)
  Bottom Layer w20: R6.2 7000,5500 7100,5400 v1(7125,5400)
NetR7_2: R7.2 U5.61 | length 1407
  Top Layer w20: R7.2 4800,5741.23 4888.77,5830 5930,5830 U5.61
NetR35_1: R35.1 U5.100 | length 665.7
  Bottom Layer w20: R35.1 4700,4100 U5.100
NetR37_2: R37.2 RV1.1 | length 582.3
  Bottom Layer w20: R37.2 2900,5701 3101,5500 RV1.1
NetR38_1: R38.1 U5.87 | length 682.8
  Bottom Layer w20: R38.1 4600,5100 U5.87
NetR43_2: R43.2 U6.6 U6.7 | length 320.7
  Bottom Layer w20: R43.2 2550,4550 U6.7 U6.6
NetR52_2: R52.2 R53.2 R55.1 | length 758
  Top Layer w20: R55.1 R53.2
  Bottom Layer w20: R52.2 4570,3130 5030,3130 R55.1
NetU1_1: U1.1 U5.6 | length 1312
  Top Layer w20: U5.6 5600,4053 v1(5680,3973) ; v1(6070,3873) 6070,3691 6211,3550 U1.1
  Bottom Layer w20: v1(5680,3973) 5970,3973 v1(6070,3873)
NetU1_2: U1.2 U5.7 | length 2618.4
  Bottom Layer w20: U5.7 5509,4391 5318,4391 5206.5,4279.5 5206.5,4150 5234.98,4121.52 5906.48,4121.52 5965,4063 6377,4063 6470,3970 6470,3926 6520,3876 6520,3725 6481,3686 6370,3608.36 6370,3475 U1.2
NetU1_5: U1.5 U5.17 | length 4110.8
  Top Layer w20: U5.17 6100,4564 5996.63,4667.37 5567.37,4667.37 5245.5,4345.5 5175.5,4345.5 5130,4300 5130,3596 5430,3296 5430,3132 5455,3107 6484,3107 6627,3250 U1.5
NetU1_6: U1.6 U5.16 | length 1729.5
  Top Layer w20: U5.16 6069.14,4169.14 6069.14,3986.29 6000,3917.15 6000,3480 6195,3285 6335,3285 6370,3250 6370,3210 6400,3180 6500,3180 6670,3350 U1.6
NetU4_5: U4.5 U5.10 | length 4994.2
  Top Layer w20: U5.10 5800,4165 5870,4130 v1(5870,4048) ; U4.5 U4.5@7585,5650 ; U4.5@7585,5650 v1(7585,5906) U4.5@7585,5650
  Bottom Layer w20: v1(5870,4048) 5196,4048 5144,4100 5144,4280.6 6216.47,5353.07 6216.47,5531.09 6712.38,6027 6974,6027 7017,5984 7161.14,5984 7245.14,5900 7579,5900 v1(7585,5906)
NetU5_79: U5.79 U8.16 | length 2358.9
  Top Layer w20: U8.16 4050,3707 4075,3732 4272,3732 4520,3980 4520,4290 4703,4473 4703,4697 4766,4760 4766,5086 4790,5110 4790,5290 U5.79
NetU5_84: U5.84 U8.14 | length 2526.4
  Top Layer w20: v1(4966,3780) 5086,3900 5086,4340 5133,4387 5206.5,4387 5210,4390.5 5210,5190 U5.84
  Bottom Layer w20: U8.14 4250,3730 4300,3780 v1(4966,3780)
NetU5_85: U5.85 U8.12 | length 1777.8
  Top Layer w20: U8.12 4450,3826 4806,4182 4806,5006 U5.85
NetU5_88: U5.88 U8.15 | length 2324.8
  Bottom Layer w20: U8.15 4150,3813 4160,3823 4599,3823 5360,4584 5360,4855 5325,4890 5310,4890 U5.88
NetU7_6: U7.6 U7.7 | length 100
  Bottom Layer w20: U7.7 U7.6
NetU7_8: U7.8 U7.9 | length 100
  Bottom Layer w20: U7.8 U7.9
NetU7_13: U7.13 U7.14 | length 100
  Bottom Layer w20: U7.13 U7.14
SW0: R9.1 S1.1 U5.98 | length 1687.1
  Top Layer w20: R9.1 4275,4425 4275,4300 4350,4225 S1.1
  Bottom Layer w20: S1.1 4350,4095 4375,4070 4483,4070 4553,4000 4711.79,4000 5170,4458.21 5170,4530 U5.98
SW1: R8.1 S1.2 U5.97 | length 978
  Top Layer w20: R8.1 4450,4050 S1.2
  Bottom Layer w20: S1.2 4450,4271 4500,4321 4721,4321 U5.97
VSC: C15.2 R51.2 W1.2 | length 3224.8
  Top Layer w20: v1(3391,4433) 3500,4324 R51.2
  Bottom Layer w20: C15.2 2200,5003 ; W1.2 2300,5150 2200,5050 2200,5003 ; v1(3391,4433) 3388,4430 2130,4430 2130,5003 2200,5003
pads on no net: DS1.5 DS2.5 DS3.5 P1.6 P1.7 P1.8 S2.3 S2.4 U4.2 U4.3 U4.6 U4.7 U5.1 U5.2 U5.12 U5.37 U5.49 U5.50 U5.51 U5.52 U5.53 U5.54 U5.55 U5.56 U5.57 U5.65 U5.68 U5.69 U5.70 U5.71 U5.72 U5.73 U5.74 U5.75 U5.76 U5.77 U5.78 U5.86 U5.91 U5.92 U5.99 U8.13

## Keep-outs
Keep-Out Layer:
  lines w10: 2050,3050 8840,3050 8840,6296 2050,6296 2050,3050

## Other copper
Top Layer:
  text "Caillet-Coussot" at 7400,6200 h100
  text "+12V" at 2700,5850 h40
  text "A" at 3650,5350 h40
  text "M" at 3300,5250 h40
  text "1" at 2400,5200 h40
  text "2" at 2850,3600 h40
  text "TOP" at 2050,3050 h100
Bottom Layer:
  text "BOT" at 2300,3050 h100

## Silkscreen, mask and mechanical layers (free items; w line width, h text height)
Top Overlay:
  text "+" at 2300,6100 h40
  text "+" at 4100,6050 h40
  text "+12V" at 2750,5950 h40
  text "-12V" at 3100,5950 h40
  text "+" at 3850,5850 h40
  text "+" at 4350,5650 h40
Drill Drawing:
  text ".LEGEND" at 9090,3200 h60
  text "Drill Drawing." at 9090,3100 h60

## Dimensions
2050,3050 to 8840,3050 on Mechanical 1
2050,3050 to 2050,6296 on Mechanical 1

## Text inside footprints (layer, text, board x,y; h text height)
P1: Top Overlay "2" at 8425.2,5435.83 h50 r90; Top Overlay "1" at 8527.56,5443.7 h50 r90
Q1: Top Overlay "S" at 3525,4540 h59.05; Top Overlay "G" at 3680,4735 h59.05; Top Overlay "D" at 3835,4535 h59.05
U2: Top Overlay "1" at 3590.16,5935.63 h59.06; Top Overlay "2" at 3680.32,5935.63 h59.06; Top Overlay "3" at 3780.32,5935.63 h59.06
U3: Top Overlay "3" at 4570.39,5920.59 h59.06; Top Overlay "1" at 4400,5920.59 h59.06
U5: Top Overlay "1" at 5300,4000 h80